# Altium PCB MAIN.PcbDoc
Units mm, origin at the board's own origin, x right, y up, seen from the top; angles counter-clockwise.
Board outline 12.7 x 40.42 mm, 2 copper layers (Top Layer, Bottom Layer); 36 components, 21 nets, 115 pads, 24 vias.
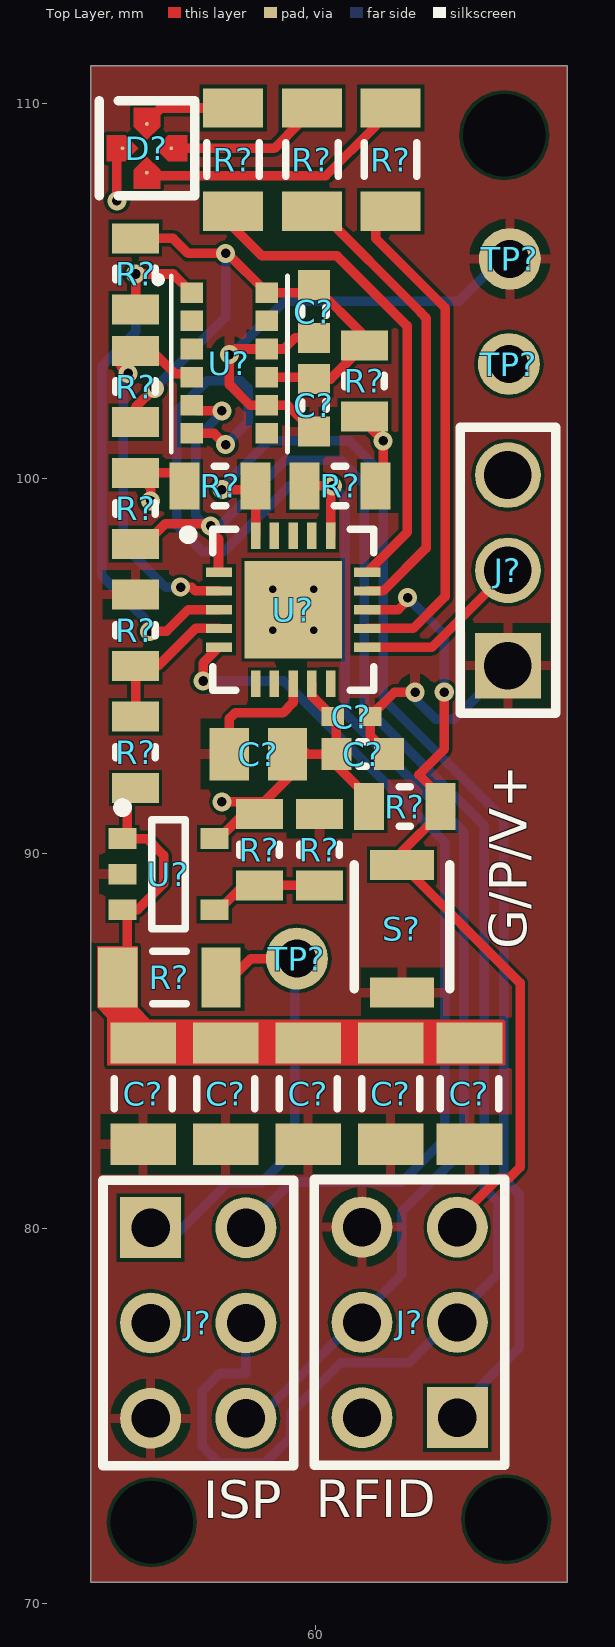
[diagram p0: Top Layer view]
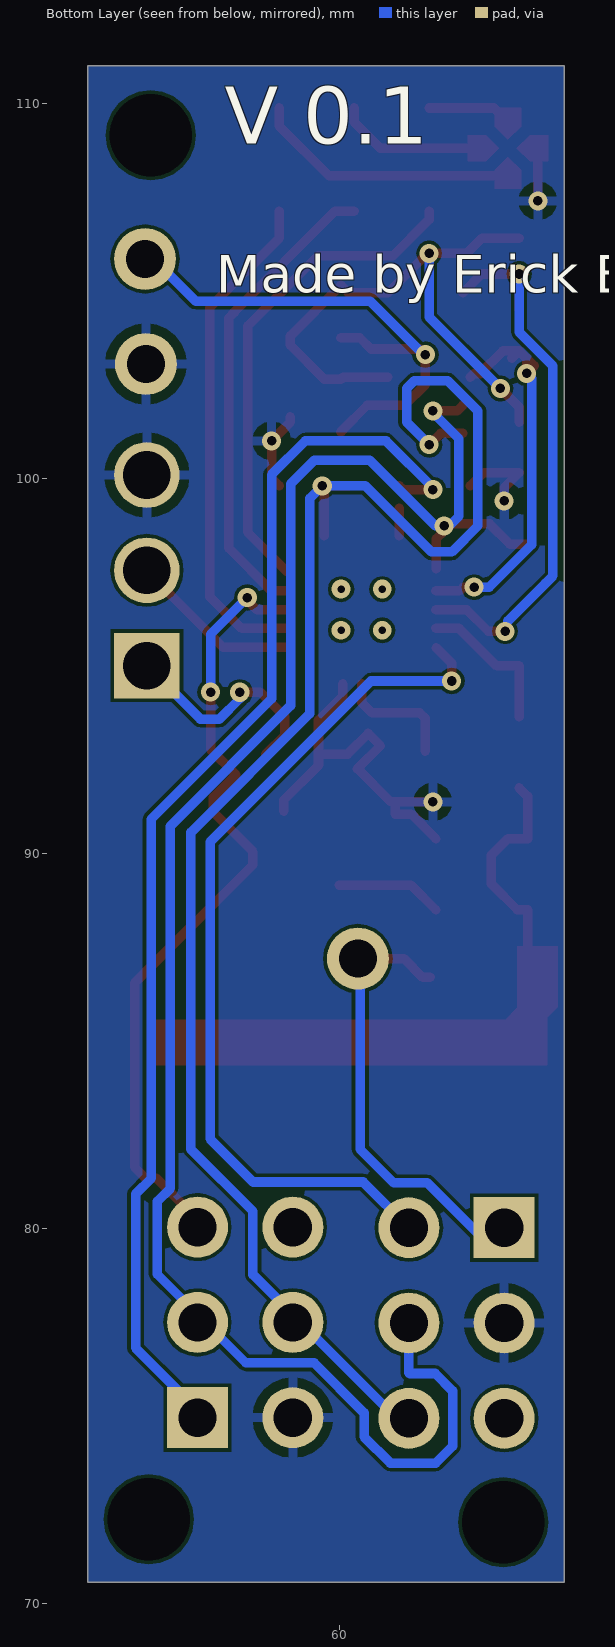
[diagram p1: Bottom Layer view, seen from below]
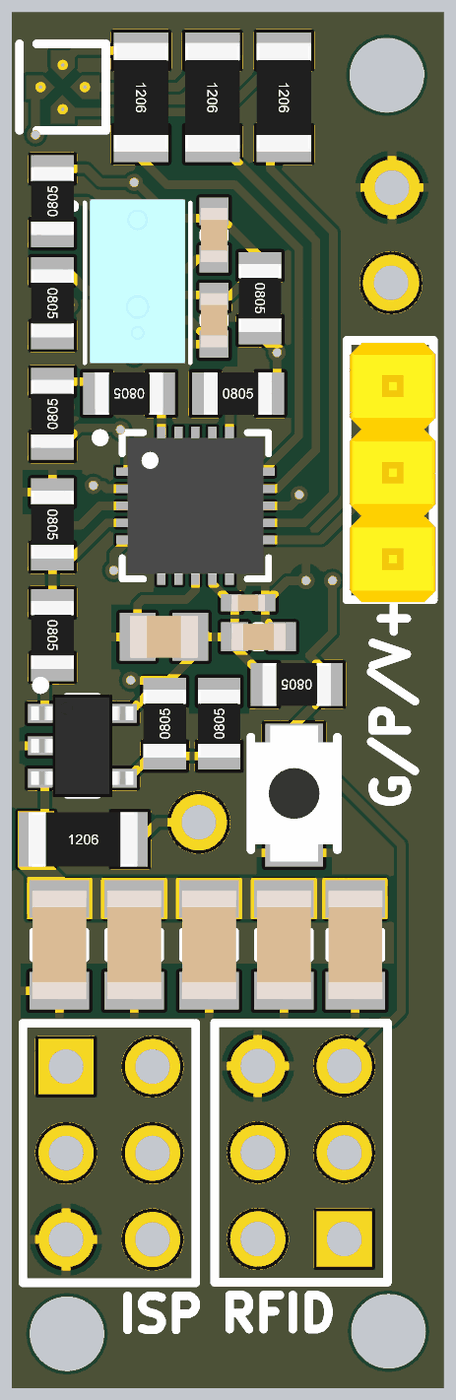
[diagram p2: 3D render of the assembled board from above, using the file's embedded part models]

## Layer stack, top to bottom
Top Solder: solder mask 0.0102, Solder Resist, Dk 3.5
Top Layer: signal copper 0.0356
Dielectric 1: dielectric 0.32, FR-4, Dk 4.8
Bottom Layer: signal copper 0.0356
Bottom Solder: solder mask 0.0102, Solder Resist, Dk 3.5

## Board outline
54,70.575 66.7,70.575 66.7,111 54,111

## Design rules (kind name [scope] priority, off if disabled: settings)
Clearance [All] p1: gap=0.09 ignorepadtopadclearanceinfootprint=FALSE
PolygonConnect [All] p1: connectstyle=Relief reliefconductorwidth=0.254 reliefentries=4 polygonreliefangle="90 Angle" airgapwidth=0.254
RoutingVias [All] p1: holewidth=0.711 width=1.27 viastyle="Through Hole" minholewidth=0.711 minwidth=1.27 maxholewidth=0.711 maxwidth=1.27
SolderMaskExpansion [All] p1: expansion=0.102
Width [All] p1: maxlimit=0.254 minlimit=0.254 preferedwidth=0.254
30 further rules are at their usual default settings.

## Classes and differential pairs
component class "Time of Flight": C? R? U?
component class "Power Supply": C? R1 R2 R? U?
component class MagController: C? D? J? R? S? TP? U?

## Components (designator, comment, footprint, x,y, rotation, side; value= is the part's Value field where it differs from the comment)
C? "CAP_100UF_1206_SMD" C1206 64.1,83.6 r270 top
C? "__template_cap" C0603 59.95,101.95 r270 top
C? "__template_cap" C0603 59.95,104.45 r270 top
C? "__template_cap" C0805 58.475,92.65 r0 top
C? "__template_cap" C0603 61.25,92.65 r180 top
C? "399-3520-1-ND" C0402 60.95,93.65 r180 top value=1e-07
C? "CAP_100UF_1206_SMD" C1206 59.8,83.6 r270 top
C? "CAP_100UF_1206_SMD" C1206 55.4,83.6 r270 top
C? "CAP_100UF_1206_SMD" C1206 62,83.6 r270 top
C? "CAP_100UF_1206_SMD" C1206 57.6,83.6 r270 top
D? "LED_CL-503T-SD-T" LED_RGB_CL-503T-SD-T 55.5,108.8 r270 top
J? "CONN_2X3" CONN_2x3_100MIL 62.505,77.5 r180 top
J? "CONN_1x3_640454-3" CONN_1x3_100MIL 65.125,95.01 r180 top
J? "CONN HEADER 6POS RA SMT" CONN_2x3_100MIL 56.87,77.485 r0 top
R? "__template_resistor" R0805 61.3,102.6 r270 top
R? "__template_resistor" R0805 58.5,90.1 r90 top
R? "__template_resistor" R0805 60.1,90.1 r90 top
R? "__template_resistor" R0805 55.2,92.7 r270 top
R? "__template_resistor" R0805 55.2,95.95 r270 top
R? "__template_resistor" R0805 55.2,99.2 r90 top
R? "__template_resistor" R0805 57.45,99.8 r180 top
R? "__template_resistor" R0805 60.65,99.8 r0 top
R? "__template_resistor" R0805 62.375,91.25 r180 top
R? "__template_resistor" R1206 62,108.5 r270 top value=200
R? "__template_resistor" R1206 57.8,108.5 r270 top value=30
R? "__template_resistor" R1206 59.9,108.5 r270 top value=30
R? "__template_resistor" R1206 56.1,86.7 r0 top value=200
R? "__template_resistor" R0805 55.2,105.45 r90 top
R? "__template_resistor" R0805 55.2,102.45 r270 top
S? "B3U-1000P" SWITCH_B3U-1000P 62.3,89.7 r270 top
TP? "TEST_POINT_BLACK_KEYSTONE_5001" TEST_POINT_KEYSTONE_5001 65.175,105.85 r0 top
TP? "TEST_POINT_RED_KEYSTONE_5000" TEST_POINT_KEYSTONE_5000 65.15,103.05 r0 top
TP? "TEST_POINT_WHITE_KEYSTONE_5002" TEST_POINT_KEYSTONE_5002 59.5,87.2 r0 top
U? "TOF_VL6180X" TOF_VL6180X 56.7,104.95 r270 top
U? "MCU_ATTINY84V" 20QFN4 59.4,96.5 r0 top
U? "LDO_MIC5225-3.5YM5 TR" 5SOT23 56.075,89.45 r0 top

## Footprints (in the part's own frame and the unit in brackets; to place one, negate y for a bottom-side part, rotate by r counter-clockwise, add the part's x,y. Pads: shape width x height; smd on the part's side, far side on the other; paste and mask are expansions set on the pad)
5SOT23 [mm] "SOT23, 5-Leads, Body 2.9x2.8mm (max), Pitch 0.95mm, IPC High Density"
  rect 0.75x0.55 smd: 1(-1.225,0.95) 2(-1.225,0) 3(-1.225,-0.95) 4(1.225,-0.95) 5(1.225,0.95)
  silkscreen extent -1.35,-1.45 0.45,1.9, body extent -1.5,-1.5 1.5,1.5, height 1.46
20QFN4 [mm] "QFN, 20-Leads, Body 4.00x4.00mm, Pitch 0.50mm, Thermal Pad 2.60x2.60mm, IPC High Density"
  rect 0.7x0.25 smd mask+0.076: 1(-1.975,1) 2(-1.975,0.5) 3(-1.975,0) 4(-1.975,-0.5) 5(-1.975,-1) 11(1.975,-1) 12(1.975,-0.5) 13(1.975,0) 14(1.975,0.5) 15(1.975,1)
  rect 0.25x0.7 smd mask+0.076: 6(-1,-1.975) 7(-0.5,-1.975) 8(0,-1.975) 9(0.5,-1.975) 10(1,-1.975) 16(1,1.975) 17(0.5,1.975) 18(0,1.975) 19(-0.5,1.975) 20(-1,1.975)
  rect 2.6x2.6 smd mask+0.076: 21(0,0)
  silkscreen extent -2.92,-2.15 2.15,2.15, body extent -2.01,-2.01 2.01,2.01, height 0.85
C0402 [mm] "Chip Capacitor, 2-Leads, Body 1.0x0.5mm, IPC High Density"
  rect 0.6x0.5 smd: 1(-0.5,0) 2(0.5,0)
  body extent -0.5,-0.25 0.5,0.25, height 0.5
C0603 [mm] "Chip Capacitor, 2-Leads, Body 1.6x0.8mm, IPC High Density"
  rect 0.8x0.85 smd: 1(-0.7,0) 2(0.7,0)
  silkscreen extent -0.1,-0.33 0.1,0.33, body extent -0.8,-0.4 0.8,0.4, height 0.8
C0805 [mm] "Chip Capacitor, 2-Leads, Body 2.0x1.3mm, IPC High Density"
  rect 1.05x1.4 smd: 1(-0.775,0) 2(0.775,0)
  body extent -1,-0.62 1,0.63, height 0.6
C1206 [mm] "Chip Capacitor, 2-Leads, Body 3.2x1.6mm, IPC High Density"
  rect 1.1x1.75 smd: 1(-1.35,0) 2(1.35,0)
  silkscreen extent -0.4,-0.77 0.4,0.77, body extent -1.6,-0.8 1.6,0.8, height 0.78
CONN_1x3_100MIL [mm] "TE 640454-3"
  rect 1.75x1.75 hole 1.27: 1(0,0)
  round 1.75 hole 1.27: 2(0,-2.54) 3(0,-5.08)
  silkscreen extent -1.27,-6.35 1.27,1.27, body extent -1.35,-6.27 1.19,1.35, height 9.5
CONN_2x3_100MIL [mil] "6 pin jtag header"
  rect 64x64 hole 40.16: 1(-50,100)
  round 64 hole 40.16: 2(50,100) 3(-50,0) 4(50,0) 5(-50,-100) 6(50,-100)
  silkscreen extent -100,-150 100,150
LED_RGB_CL-503T-SD-T [mm]
  round 0.1 smd: 1(0.651,0) 2(0,-0.651) 3(-0.651,0) 4(0,0.651)
  Top Layer region: 0.35,-1.076 0.35,-0.576 0,-0.226 -0.35,-0.576 -0.35,-1.076
  Top Layer region: -1.076,-0.35 -0.576,-0.35 -0.226,0 -0.576,0.35 -1.076,0.35
  Top Layer region: -0.35,1.076 -0.35,0.576 0,0.226 0.35,0.576 0.35,1.076
  Top Layer region: 1.076,0.35 0.576,0.35 0.226,0 0.576,-0.35 1.076,-0.35
  silkscreen extent -1.27,-1.27 1.27,1.27, body extent -0.65,-0.76 0.65,0.76, height 0.35
R0805 [mm] "Chip Resistor, 2-Leads, Body 2.0x1.3mm, IPC High Density"
  rect 0.8x1.25 smd: 1(-0.95,0) 2(0.95,0)
  silkscreen extent -0.15,-0.53 0.15,0.53, body extent -1,-0.62 1,0.63, height 0.6
R1206 [mm] "Chip Resistor, 2-Leads, Body 3.1x1.6mm, IPC High Density"
  rect 1.05x1.6 smd: 1(-1.375,0) 2(1.375,0)
  silkscreen extent -0.45,-0.7 0.45,0.7, body extent -1.6,-0.8 1.6,0.8, height 0.6
SWITCH_B3U-1000P [mm]
  rect 0.8x1.7 smd: 1(0,0) 2(3.4,0)
  silkscreen extent 0,-1.27 3.3,1.27, body extent -0.35,-1.25 3.65,1.25, height 1.6
TEST_POINT_KEYSTONE_5000 [mil] "Red T/H Test Point"
  round 65 hole 40: 1(0,0)
  body extent -50,-50 50,50, height 180
TEST_POINT_KEYSTONE_5001 [mil] "Black T/H Test Point"
  round 65 hole 40: 1(0,0)
  body extent -50,-50 50,50, height 180
TEST_POINT_KEYSTONE_5002 [mil] "White T/H Test Point"
  round 65 hole 40: 1(0,0)
  body extent -50,-50 50,50, height 180
TOF_VL6180X [mm] "Proximity and ambient light sensing (ALS) module footprint"
  rect 0.55x0.6 smd: 1(0,0) 2(0.75,0) 3(1.5,0) 4(2.25,0) 5(3,0) 6(3.75,0) 7(3.75,2) 8(3,2) 9(2.25,2) 10(1.5,2) 11(0.75,2) 12(0,2)
  silkscreen extent -0.45,-0.95 4.25,2.55, body extent -0.55,-0.4 4.25,2.4, height 1

## Part data
C? C? C? C? C?: "100UF SMD CAP CERAMIC", Capacitance=100µF, Manufacturer="Murata Electronics North America", Manufacturer Part Number=GRM31CD80J107ME39L, Operating Temperature="-55°C ~ 105°C", Package / Case="1206 (3216 Metric)", Ratings=-, Supplier Part Number 1=490-10525-1-ND, Temperature Coefficient=X6T, tolerance=±20%, Voltage - Rated=6.3V, Applications="General Purpose", Category=Capacitors, ComponentLink1Description=http://www.murata.com/~/media/webrenewal/support/library/catalog/products/capacitor/mlcc/c02e.ashx, ComponentLink1URL=http://www.murata.com/~/media/webrenewal/support/library/catalog/products/capacitor/mlcc/c02e.ashx, Features="Derating Recommended", Height - Seated (Max)=-, Lead Spacing=-, Lead Style=-, Mounting Type="Surface Mount, MLCC", Packaging="Cut Tape (CT)", Part Status=Active, Pricing 1="1=0.55, 10=0.388, 25=0.3308, 50=0.2932, 100=0.2553, 250=0.21748, 500=0.1891, 1000=0.16074 (USD)", RoHS="RoHS Compliant", Size / Dimension="0.126\" L x 0.063\" W (3.20mm x 1.60mm)", Stock 1=406964, Supplier 1=Digi-Key, Thickness (Max)="0.071\" (1.80mm)"
C? C?: library part "CAP CER 0603 0.1µF X7R 50V 10%", Capacitance (shorthand)=0.1µF, Capacitance - pF (Machine readable)=100000, Dielectric=X7R, Manufacturer="Murata Electronics North America", Rated Voltage=50V, Supplier Part Number 1=490-1519-1-ND, Supplier 1=Digikey, type=capacitor
C?: library part "CAP CER 0.1UF 50V X7R 0805", Capacitance (shorthand)=0.1µF, Capacitance - pF (Machine readable)=100000, Dielectric=X7R, Manufacturer="Murata Electronics North America", Rated Voltage=50V, Supplier Part Number 1=490-1666-1-ND, type=capacitor
C?: library part "CAP CER 2.2UF 16V X5R 0603 10%", Capacitance (shorthand)=2.2µF, Capacitance - pF (Machine readable)=2200000, Dielectric=X5R, Manufacturer="Murata Electronics North America", Rated Voltage=25V, Supplier Part Number 1=490-10731-1-ND, Supplier 1=Digikey, type=capacitor
C?: human_value=100n, package=0402, tolerance=10%, voltage=10.0, price=0.06, Supplier Part Number 1=399-3520-1-ND, type=capacitor
D?: "RGB LOW VOLTAGE RICOLOR TOP FIRING 1.5 X 1.3 X", Color="Red, Green, Blue (RGB)", Current - Test="5mA Red, 5mA Green, 5mA Blue", Lens Color=-, Manufacturer=Citizen, Manufacturer Part Number=CL-503T-SD-T, Millicandela Rating="36mcd Red, 180mcd Green, 40mcd Blue", Package / Case="4-SMD, No Lead", Supplier Part Number 1=1642-1509-2-ND, Voltage - Forward (Vf) (Typ)="1.85V Red, 2.7V Green, 2.75V Blue", Category=Optoelectronics, ComponentLink1Description=http://ce.citizen.co.jp/up_img/product/KF9Gun57LXzH/CL-503_e.pdf, ComponentLink1URL=http://ce.citizen.co.jp/up_img/product/KF9Gun57LXzH/CL-503_e.pdf, Configuration="Common Anode", Features=-, Height (Max)=0.35mm, Lens Style/Size="Rectangle with Flat Top, 1.30mm x 1.50mm", Lens Transparency=-, Mounting Type="Surface Mount", Packaging="Tape & Reel (TR)", Part Status=Active, Pricing 1="5000=0.2318, 10000=0.22836, 25000=0.22321 (USD)", RoHS="RoHS Compliant", Size / Dimension="1.50mm L x 1.30mm W", Stock 1=15000, Supplier 1=Digi-Key, Supplier Device Package=-, Viewing Angle=-, Wavelength - Dominant=-, Wavelength - Peak="618nm Red, 530nm Green, 470nm Blue"
J?: "CONN HEADER VERT 3POS .100 TIN", Color=Natural, Manufacturer="TE Connectivity", Manufacturer Part Number=640454-3, Supplier Part Number 1=A19430-ND, Category="Connectors, Interconnects", ComponentLink1Description=Datasheet, ComponentLink1URL=http://www.te.com/commerce/DocumentDelivery/DDEController?Action=srchrtrv&DocNm=640454&DocType=Customer+Drawing&DocLang=English, Connector Type="Header, Unshrouded", Contact Finish=Tin, Contact Finish Thickness=-, Contact Mating Length="0.295\" (7.49mm)", Contact Type="Male Pin", Fastening Type=-, Features="Polarizing Key", Mounting Type="Through Hole", Number of Positions=3, Number of Positions Loaded=All, Number of Rows=1, Packaging=Bulk, Pitch="0.100\" (2.54mm)", Pricing 1="1=0.17, 10=0.162, 25=0.1204, 50=0.1032, 100=0.0997, 250=0.08592, 500=0.08248, 1000=0.07218, 2500=0.0653 (USD)", RoHS="RoHS Compliant", Row Spacing=-, Stock 1=6372, Supplier 1=Digi-Key, Termination=Solder
J?: library part CONN_2X3
R?: library part "RES SMD 0 OHM JUMPER 1/8W 0805", Manufacturer=Yageo, Manufacturer Part Number=RC0805FR-070RL, Operating Temperature="-55°C ~ 155°C", Power (Watts)="0.125W, 1/8W", Resistance="0 ?", Resistance (Sortable)=0, Supplier Part Number 1=311-0.0CRCT-ND, Temperature Coefficient=-, tolerance=Jumper, Datasheets=http://www.yageo.com/documents/recent/PYu-RC_Group_51_RoHS_L_9.pdf, Image=//media.digikey.com/Renders/Yageo%20Renders/0805-(2012-Metric).jpg, Supplier 1=Digikey
R?: library part "RES SMD 124K OHM 1% 1/8W 0805", Manufacturer=Yageo, Manufacturer Part Number=RC0805FR-07124KL, Operating Temperature="-55°C ~ 155°C", Power (Watts)="0.125W, 1/8W", Resistance="124 k?", Resistance (Sortable)=124000, Supplier Part Number 1=311-124KCRCT-ND, Temperature Coefficient=±100ppm/°C, tolerance=±1%, Datasheets=http://www.yageo.com/documents/recent/PYu-RC_Group_51_RoHS_L_9.pdf, Image=//media.digikey.com/Renders/Yageo%20Renders/0805-(2012-Metric).jpg, Supplier 1=Digikey
R? R? R?: library part "RES SMD 100K OHM 1% 1/8W 0805", Manufacturer=Yageo, Manufacturer Part Number=RC0805FR-07100KL, Operating Temperature="-55°C ~ 155°C", Power (Watts)="0.125W, 1/8W", Resistance="100 k?", Resistance (Sortable)=100000, Supplier Part Number 1=311-100KCRCT-ND, Temperature Coefficient=±100ppm/°C, tolerance=±1%, Datasheets=http://www.yageo.com/documents/recent/PYu-RC_Group_51_RoHS_L_9.pdf, Image=//media.digikey.com/Renders/Yageo%20Renders/0805-(2012-Metric).jpg, Supplier 1=Digikey
R? R? R? R? R? R?: library part "RES SMD 4.7K OHM 1% 1/8W 0805", Manufacturer=Yageo, Manufacturer Part Number=RC0805FR-074K7L, Operating Temperature="-55°C ~ 155°C", Power (Watts)="0.125W, 1/8W", Resistance="4.7 k?", Resistance (Sortable)=4700, Supplier Part Number 1=311-4.70KCRCT-ND, Temperature Coefficient=±100ppm/°C, tolerance=±1%, Datasheets=http://www.yageo.com/documents/recent/PYu-RC_Group_51_RoHS_L_9.pdf, Image=//media.digikey.com/Renders/Yageo%20Renders/0805-(2012-Metric).jpg, Supplier 1=Digikey
R? R?: library part "RES SMD 200 OHM 1% 1/4W 1206", Manufacturer="Vishay Dale", Manufacturer Part Number=CRCW1206200RFKEA, package="1206 (3216 Metric)", Power (Watts)="0.25W, 1/4W", Resistance (Machine readable)=200.00, Supplier Part Number=541-200FCT-ND, tolerance=±1%, Mouser PN Opt 1=71-CRCW1206200RFKEA, Mouser PN Opt 2=71-CRCW1206-200-E3, Packaging="Cut Tape (CT)", Series=CRCW, Supplier 1=Digikey, Supplier 2=Mouser, Supplier Part Number 1=541-200FCT-ND, Supplier Part Number 2=71-CRCW1206-200-E3, type=resistor, Unit Price (USD)=0.102
R? R?: library part "RES SMD 30 OHM 1% 1/4W 1206", Manufacturer="Vishay Dale", Manufacturer Part Number=CRCW120630R0FKEA, package="1206 (3216 Metric)", Power (Watts)="0.25W, 1/4W", Resistance (Machine readable)=30.00, Supplier Part Number=541-30.0FCT-ND, tolerance=±1%, Mouser PN Opt 1=71-CRCW120630R0FKEA, Mouser PN Opt 2=71-CRCW1206-30-E3, Packaging="Cut Tape (CT)", Series=CRCW, Supplier 1=Digikey, Supplier 2=Mouser, Supplier Part Number 1=541-30.0FCT-ND, Supplier Part Number 2=71-CRCW1206-30-E3, type=resistor, Unit Price (USD)=0.102
S?: library part SWITCH_SPST-NO, "SWITCH TACTILE SPST-NO 0.05A 12V", Contact Rating @ Voltage="0.05A @ 12VDC", Illumination Type, Color=-, Manufacturer="Omron Electronics Inc-EMC Div", Operating Force=153gf, Operating Temperature="-25°C ~ 70°C", Supplier Part Number 1=SW1020CT-ND, Actuator Height off PCB, from Pins=1.60mm, Actuator Material=-, Actuator Orientation="Top Actuated", Actuator Type=Standard, Category=Switches, Circuit=SPST-NO, ComponentLink1Description=http://components.omron.com/components/web/pdflib.nsf/0/2DD3893C7DD33E9E862572900079E9D6/$file/B3U_1110.pdf, ComponentLink1URL=http://components.omron.com/components/web/pdflib.nsf/0/2DD3893C7DD33E9E862572900079E9D6/$file/B3U_1110.pdf, Features=-, Illumination=Non-Illuminated, Illumination Voltage (Nominal)=-, Ingress Protection="Dust Proof", Manufacturer Part Number=B3U-1000P, Mechanical Life="200,000 Cycles", Mounting Type="Surface Mount", Outline="3.00mm x 2.50mm", Packaging="Cut Tape (CT)", Pricing 1="1=1.25, 10=1.201, 25=1.1332, 50=0.997, 100=0.9064, 250=0.86108, 500=0.83842, 1000=0.65714 (USD)", RoHS="RoHS Compliant", Stock 1=16437, Supplier 1=Digi-Key, Switch Function=Off-Mom, Switch Travel=0.15mm, Termination Style="SMD (SMT) Tab"
TP?: "BLACK T/H TEST POINT", Color=Black, Manufacturer="Keystone Electronics", Manufacturer Part Number=5001, Supplier Part Number 1=36-5001-ND, Category="Test and Measurement", ComponentLink1Description=http://www.keyelco.com/product-pdf.cfm?p=1310, ComponentLink1URL=http://www.keyelco.com/product-pdf.cfm?p=1310, Material - Body="Phosphor Bronze", Material - Insulation="Nylon 46, UL 94V-0", Mounting Type="0.040\" (1.02mm) Hole Diameter", Packaging=Bulk, Part Status=Active, Plating=Silver, Pricing 1="1=0.37, 10=0.316, 50=0.2298, 100=0.2209, 250=0.19832, 500=0.18932, 1000=0.1616, 2500=0.14424, 5000=0.13523 (USD)", RoHS="RoHS Compliant", Size / Dimension="0.100\" Dia x 0.180\" L (2.54mm x 4.57mm)", Stock 1=718799, Supplier 1=Digi-Key, type="PC Test Point, Miniature"
TP?: "RED T/H TEST POINT", Color=Red, Manufacturer="Keystone Electronics", Manufacturer Part Number=5000, Supplier Part Number 1=36-5000-ND, Category="Test and Measurement", ComponentLink1Description=http://www.keyelco.com/product-pdf.cfm?p=1309, ComponentLink1URL=http://www.keyelco.com/product-pdf.cfm?p=1309, Material - Body="Phosphor Bronze", Material - Insulation="Nylon 46, UL 94V-0", Mounting Type="0.040\" (1.02mm) Hole Diameter", Packaging=Bulk, Part Status=Active, Plating=Silver, Pricing 1="1=0.37, 10=0.316, 50=0.2298, 100=0.2209, 250=0.19832, 500=0.18932, 1000=0.1616, 2500=0.14424, 5000=0.13523 (USD)", RoHS="RoHS Compliant", Size / Dimension="0.100\" Dia x 0.180\" L (2.54mm x 4.57mm)", Stock 1=399527, Supplier 1=Digi-Key, type="PC Test Point, Miniature"
TP?: "WHITE T/H TEST POINT", Color=White, Manufacturer="Keystone Electronics", Manufacturer Part Number=5002, Supplier Part Number 1=36-5002-ND, Category="Test and Measurement", ComponentLink1Description=http://www.keyelco.com/product-pdf.cfm?p=1311, ComponentLink1URL=http://www.keyelco.com/product-pdf.cfm?p=1311, Material - Body="Phosphor Bronze", Material - Insulation="Nylon 46, UL 94V-0", Mounting Type="0.040\" (1.02mm) Hole Diameter", Packaging=Bulk, Part Status=Active, Plating=Silver, Pricing 1="1=0.37, 10=0.316, 50=0.2298, 100=0.2209, 250=0.19832, 500=0.18932, 1000=0.1616, 2500=0.14424, 5000=0.13523 (USD)", RoHS="RoHS Compliant", Size / Dimension="0.100\" Dia x 0.180\" L (2.54mm x 4.57mm)", Stock 1=460002, Supplier 1=Digi-Key, type="PC Test Point, Miniature"
U?: "Proximity and ambient light sensing (ALS) module", Manufacturer=STMicroelectronics, Manufacturer Part Number=VL6180XV0NR/1, Operating Temperature="-10°C ~ 60°C", Package / Case="12-SMD Module", Supplier Device Package=12-SMD, Supplier Part Number 1=497-14702-1-ND, Voltage - Supply="2.6 V ~ 3 V", Category="Sensors, Transducers", ComponentLink1Description=http://www.st.com/content/ccc/resource/technical/document/datasheet/c4/11/28/86/e6/26/44/b3/DM00112632.pdf/files/DM00112632.pdf/jcr:content/translations/en.DM00112632.pdf, ComponentLink1URL=http://www.st.com/content/ccc/resource/technical/document/datasheet/c4/11/28/86/e6/26/44/b3/DM00112632.pdf/files/DM00112632.pdf/jcr:content/translations/en.DM00112632.pdf, Mounting Type="Surface Mount", Output Type=I²C, Packaging="Cut Tape (CT)", Part Status=Active, Pricing 1="1=4.91, 10=4.413, 100=3.6153 (USD)", Proximity Detection=Yes, RoHS="RoHS Compliant", Stock 1=2774, Supplier 1=Digi-Key, type=Ambient, Wavelength=-
U?: "Attiny84 Surface Mount Extended Voltage Range", Manufacturer="Microchip Technology", Manufacturer Part Number=ATTINY84V-10MUR, Operating Temperature="-40°C ~ 85°C (TA)", Package / Case="20-WFQFN Exposed Pad", Supplier Device Package="20-QFN-EP (4x4)", Supplier Part Number 1=1611-ATTINY84V-10MURCT-ND, Voltage - Supply (Vcc/Vdd)="1.8 V ~ 5.5 V", Category="Integrated Circuits (ICs)", Connectivity=USI, Core Processor=AVR, Core Size=8-Bit, Data Converters="A/D 8x10b", EEPROM Size="512 x 8", Oscillator Type=Internal, Packaging="Cut Tape (CT)", Part Status=Active, Peripherals="Brown-out Detect/Reset, POR, PWM, Temp Sensor, WDT", Pricing 1="1=1.01, 25=0.92, 100=0.835 (USD)", Program Memory Size="8KB (4K x 16)", Program Memory Type=FLASH, RAM Size="512 x 8", RoHS="RoHS Compliant", Speed=10MHz, Stock 1=9687, Supplier 1=Digi-Key
U?: "IC REG LINEAR 3.3V 150MA SOT23-5", Base Part Number=MIC5225, Current - Output=150mA, Manufacturer="Microchip Technology", Manufacturer Part Number=MIC5225-3.3YM5-TR, Operating Temperature="-40°C ~ 125°C", Package / Case="SC-74A, SOT-753", Supplier Device Package=SOT-23-5, Supplier Part Number 1=576-2980-1-ND, Voltage - Input (Max)=16V, Voltage - Output (Max)=-, Voltage - Output (Min/Fixed)=3.3V, Voltage Dropout (Max)="0.45V @ 150mA", Category="Integrated Circuits (ICs)", ComponentLink1Description=http://www.microchip.com/mymicrochip/filehandler.aspx?ddocname=en579718, ComponentLink1URL=http://www.microchip.com/mymicrochip/filehandler.aspx?ddocname=en579718, Control Features=Enable, Mounting Type="Surface Mount", Output Configuration=Positive, Output Type=Fixed, Packaging="Cut Tape (CT)", Part Status=Active, Pricing 1="1=0.41, 25=0.3392, 100=0.3074 (USD)", Protection Features="Over Current, Over Temperature, Reverse Polarity", PSRR=-, RoHS="RoHS Compliant", Stock 1=14087, Supplier 1=Digi-Key

## Free pads (board coordinates)
  round 1.524 hole 2.2 unplated: 2(55.625,72.175) 2(65.025,109.15) 2(65.075,72.25)

## Via types
v1: diameter 0.508, hole 0.254, Top Layer to Bottom Layer, tented both sides, 20 vias
v2: diameter 0.5, hole 0.2, Top Layer to Bottom Layer, 4 vias

## Nets (pads, with @x,y where several pads share a name; then routed paths per layer and width w, separated by ;. In a path a pad name is that pad's centre, name@x,y a point inside that pad or via, vN(x,y) a via of type N, cw(c..) or ccw(c..) an arc to the next point about the centre after c; other vN are vias at no path point)
+2.8V: C?.2@59.25,92.65 C?.2@60.45,93.65 C?.2@60.55,92.65 D?.2 J?.2@61.235,74.96 J?.3@55.6,77.485 J?.3@65.125,100.09 R?.2@55.2,100.15 R?.2@56.5,99.8 R?.2@58.5,91.05 R?.2@61.3,101.65 R?.2@61.6,99.8 R?.2@61.425,91.25 TP?.1@65.15,103.05 U?.5@57.3,90.4 U?.9@59.9,94.525 | length 16.9
  Top Layer w0.254: v1(54.7,107.4) 54.7,108.651 D?.2 ; v1(55.6,99.4) 55.6,99.75 55.2,100.15 56.15,100.15 R?.2@56.5,99.8 ; U?.5@57.425,90.4 58.075,91.05 58.5,91.05 R?.2@58.5,91.375 ; v1(57.5,91.375) 58.475,91.375 R?.2@58.5,91.375 ; U?.9@59.9,94.525 59.9,94.2 60.55,93.55 C?.2@60.55,92.65 ; R?.2@61.3,101.65 61.3,101.5 v1(61.8,101) 61.8,100 R?.2@61.6,99.8 ; R?.2@61.475,91.125 61.475,91.425 60.55,92.35 C?.2@60.55,92.65 ; R?.2@58.5,91.375 58.625,91.375 59.512,92.262 58.9,92.875 59.225,93.2 59.775,92.65 C?.2@60.55,92.65
"+2.8V TOF": C?.1@59.95,102.65 C?.1@59.95,105.15 R?.1@61.3,103.55 R?.2@55.2,101.5 R?.2@55.2,106.4 U?.9@58.7,102.7 U?.12@58.7,104.95 | length 16.1
  Top Layer w0.254: R?.2@55.2,101.5 55.2,101.9 v1(55.7,102.4) ; R?.2@55.2,106.4 56.2,106.4 56.6,106 v1(57.6,106) 57.65,106 58.7,104.95 59.75,104.95 59.95,105.15 61.3,103.8 61.3,103.55 60.4,102.65 59.95,102.65 59.9,102.7 U?.9@58.7,102.7
  Bottom Layer w0.254: v1(55.7,102.4) 57.6,104.3 v1(57.6,106)
+CAP_IN: C?.1@55.4,84.95 C?.1@57.6,84.95 C?.1@59.8,84.95 C?.1@62,84.95 C?.1@64.1,84.95 R?.1@54.725,86.7 R?.2@55.2,91.75 U?.1@54.85,90.4 U?.3@54.85,88.5 | length 6.7
  Top Layer w0.254: R?.1@54.975,86.85 54.975,88.5 55.25,88.5 55.95,89.2 55.95,89.95 55.5,90.4 54.975,90.4 54.975,91.525 R?.2@55.2,91.75 ; C?.1@55.075,84.775 C?.1@55.3,85 ; C?.1@62,84.95 C?.1@62.1,84.95
+H_IN: J?.1@55.6,80.025 R?.2@57.475,86.7 TP?.1@59.5,87.2 | length 13
  Top Layer w0.254: R?.2@57.575,86.7 57.775,86.7 58.275,87.2 58.95,87.2 59.5,86.65 TP?.1@59.5,87.2
  Bottom Layer w0.254: J?.1@55.6,80.025 56.075,80.025 56.075,79.648 57.646,81.219 58.544,81.219 59.438,82.113 TP?.1@59.437,86.963
B_CAT: R?.2@59.9,107.125 U?.14 | length 12.7
  Top Layer w0.254: R?.2@59.6,107.125 59.9,107.125 60.106,107.125 62.8,104.431 62.8,104.418 62.943,104.275 62.943,98.143 61.8,97 U?.14
G_CAT: R?.2@57.8,107.125 U?.15 | length 13.2
  Top Layer w0.254: R?.2@57.6,107.125 57.6,106.9 58.569,105.931 60.569,105.931 62.435,104.065 62.435,98.56 U?.15@61.383,97.508
GND: C?.1@57.7,92.65 C?.1@61.45,93.65 C?.1@61.95,92.65 C?.2@55.4,82.25 C?.2@57.6,82.25 C?.2@59.8,82.25 C?.2@59.95,101.25 C?.2@59.95,103.75 C?.2@62,82.25 C?.2@64.1,82.25 J?.1@65.125,95.01 J?.5@55.6,74.945 J?.6@61.235,80.04 R?.1@55.2,96.9 R?.2@60.1,91.05 S?.2 TP?.1@65.175,105.85 U?.2@54.85,89.45 U?.8 U?.10@58.7,103.45 | length 23.8
  Top Layer w0.254: C?.1@57.7,92.725 57.7,93.6 57.85,93.75 59.125,93.75 59.4,94.025 U?.8@59.4,94.525 ; C?.2@59.95,101.25 59.25,101.95 58.7,101.95 58.25,101.95 57.7,102.5 v1(57.7,103.3) 57.85,103.45 58.7,103.45 59.15,103.45 59.45,103.75 C?.2@59.95,103.75 ; C?.1@61.95,92.65 61.45,93.15 61.45,93.65 62.1,94.3 v1(62.65,94.3)
  Bottom Layer w0.254: v1(57.7,103.3) 57.725,103.275 59.175,104.725 63.825,104.725 TP?.1@64.975,105.875 ; v1(62.65,94.3) 62.65,94.125 63.192,93.583 63.698,93.583 J?.1@65.125,95.01
GPIO0: R?.1@55.2,103.4 U?.2@57.425,97 U?.4@56.7,102.7 | length 10.8
  Top Layer w0.254: R?.1@55.4,103.2 R?.1@55.2,103.4 ; v1(56.4,97.1) 56.691,97.1 56.791,97 U?.2@57.425,97 ; U?.4@56.5,102.7 56.406,102.794 56.242,102.794 55.636,103.4 R?.1@55.2,103.4 ; R?.1@55,103.2 54.8,103 v1(55,102.8) R?.1@55,103.2 ; R?.1@55,103.2 R?.1@55.2,103.4
  Bottom Layer w0.254: v1(55,102.8) 54.865,102.665 54.865,98.235 56,97.1 v1(56.4,97.1)
GPIO1: R?.1@55.2,104.5 U?.1@56.7,104.95 U?.3@57.425,96.5 | length 14.9
  Top Layer w0.254: R?.1@55.2,104.5 v1(55.2,105.45) 56.2,105.45 U?.1@56.7,104.95 ; v1(55.575,95.925) 56.025,95.925 56.6,96.5 U?.3@57.425,96.5
  Bottom Layer w0.254: v1(55.2,105.45) 55.2,103.9 54.3,103 54.3,97.4 54.5,97.2 55.15,96.55 55.5,96.2
MISO: J?.1@63.775,74.96 R?.1@58.4,99.8 U?.20 | length 34.3
  Top Layer w0.254: v1(57.5,99.7) 58.3,99.7 R?.1@58.4,99.8 ; U?.20 R?.1@58.4,99.206
  Bottom Layer w0.254: v1(57.5,99.7) 57.5,99.75 58.75,101 60.902,101 61.8,100.102 61.8,94.125 65.008,90.917 65.008,81.342 65.425,80.925 65.425,76.82 J?.1@63.575,74.97
NetD?_1: D?.1 R?.1@62,109.875 | length 7.1
  Top Layer w0.254: 55.7,108 55.631,108.069 60.269,108.069 61.6,109.4 R?.1@61.6,109.875
NetD?_3: D?.3 R?.1@57.8,109.875 | length 2.3
  Top Layer w0.254: 55.5,109.502 55.873,109.875 R?.1@57.6,109.875
NetD?_4: D?.4 R?.1@59.9,109.875 | length 4.2
  Top Layer w0.254: 56.151,108.969 56.32,108.8 58.9,108.8 59.6,109.5 R?.1@59.6,109.875
NetR?_1: R?.1@58.5,89.15 R?.1@60.1,89.15 U?.4@57.3,88.5 | length 2.8
  Top Layer w0.254: U?.4@57.425,88.5 58.075,89.15 58.5,89.15 R?.1@60,89.15
POT_SENSE: J?.2@65.125,97.55 U?.11@61.375,95.5 | length 4.6
  Top Layer w0.254: U?.11@61.375,95.5 63.1,95.5 J?.2@65.1,97.5
PWR_SENSE: R?.1@55.2,93.65 R?.2@55.2,95 U?.4@57.425,96 | length 4
  Top Layer w0.254: R?.1@55.2,93.65 55.2,95 55.8,95 56.8,96 U?.4@57.425,96
R_CAT: R?.2@62,107.125 U?.12@61.375,96 | length 13.5
  Top Layer w0.254: U?.12@61.375,96 62.6,96 63.451,96.851 63.451,104.549 61.6,106.4 R?.2@61.6,107.125
RESET: J?.5@63.775,80.04 R?.1@63.325,91.25 S?.1 U?.13 | length 21.7
  Top Layer w0.254: U?.13 62.2,96.5 v1@62.45,96.75 ; v1@62.45,96.718 v1@62.45,96.75 ; v1(62.45,96.825) v1@62.45,96.75 ; v1(63.428,94.305) 63.428,92.778 62.75,92.1 63.35,91.5 63.35,91.1 62.3,90.05 S?.1 65.45,86.55 65.45,81.636 65.158,81.344 64.869,81.344 J?.5@63.575,80.05
  Bottom Layer w0.254: v1(62.45,96.825) 63.428,95.847 v1(63.428,94.305)
RF_BUSY: J?.2@58.14,80.025 U?.5@57.425,95.5 | length 23.5
  Top Layer w0.254: v1(57,94.6) 57,95.075 U?.5@57.417,95.492
  Bottom Layer w0.254: v1(57,94.6) 59.15,94.6 63.442,90.308 63.442,82.392 62.294,81.244 59.359,81.244 J?.2@58.14,80.025
SCL: J?.3@63.775,77.5 J?.4@58.14,77.485 R?.1@55.2,98.25 U?.1@57.425,97.5 U?.5@56.7,101.95 | length 50.6
  Top Layer w0.254: R?.1@54.95,98.25 55.2,98.25 55.45,98.25 55.988,98.788 57,98.788 57.188,98.6 v1@57.2,98.612 ; U?.5@56.7,101.95 56.85,101.8 v1(57.5,101.8) ; v1(57.2,98.735) v1@57.2,98.612 ; U?.1@57.409,97.587 57.409,98.391 57.2,98.6 v1@57.2,98.612
  Bottom Layer w0.254: v1(57.5,101.8) 57.45,101.8 57.5,101.75 56.808,101.058 56.808,98.992 57.065,98.735 v1(57.2,98.735) 57.435,98.735 59.191,100.491 60.657,100.491 61.292,99.856 61.292,93.942 64.5,90.734 64.5,81.075 64.85,80.725 64.85,78.785 62.49,76.425 60.668,76.425 59.334,75.09 59.334,74.451 58.634,73.751 57.424,73.751 56.975,74.2 56.975,75.675 57.439,76.139 58.123,76.139 58.14,76.156 J?.4@58.14,77.485
SDA: J?.4@61.235,77.5 J?.6@58.14,74.945 R?.1@59.7,99.8 U?.6@56.7,101.2 U?.16 | length 44.3
  Top Layer w0.254: U?.6@56.7,101.2 57.292,101.2 57.592,100.9 v1(57.6,100.9) ; R?.1@59.75,99.8 v1(60.45,99.8) 60.4,99.75 U?.16
  Bottom Layer w0.254: v1(57.6,100.9) 58.2,101.5 58.2,102.4 58,102.6 57.1,102.6 56.3,101.8 56.3,98.737 56.995,98.042 57.542,98.042 59.3,99.8 v1(60.45,99.8) 60.784,99.466 60.784,93.731 63.95,90.565 63.95,82.113 62.3,80.463 62.3,78.775 61.035,77.51 58.47,74.945 J?.6@58.14,74.945
pads on no net: U?.2@56.7,104.2 U?.3@56.7,103.45 U?.6@58.4,94.525 U?.7 U?.10@60.4,94.525 U?.11@58.7,104.2 U?.17 U?.18 U?.19 U?.21
copper on no net:
  other v2: 58.85,95.95 59.95,95.95 58.85,97.05 59.95,97.05

## Polygon pours and split planes (outlines as drawn)
+2.8V on Bottom Layer "+2.8V Pour" (solid, pour order 2): 54,111 66.7,111 66.7,70.575 54,70.575
GND on Top Layer "GND Pour" (solid, pour order 0): 54,111 66.7,111 66.7,70.575 54,70.575

## Other copper
Top Layer:
  region net +CAP_IN: 55.25,85.9 55.575,85.575 65,85.575 65.05,85.525 65.05,84.375 65.025,84.35 54.45,84.35 54.45,85.625 54.175,85.9 54.175,87.525 55.25,87.525

## Silkscreen, mask and mechanical layers (free items; w line width, h text height)
Top Overlay:
  text "G/P/V+" at 65.625,87.45 h1 r90
  text "RFID" at 60,72.3 h1
  text "ISP" at 57,72.275 h1
Bottom Overlay:
  text "V 0.1" at 63.05,108.925 h1.52
  text "Made by Erick B." at 63.275,104.95 h1
Mechanical 1:
  the board outline again, w0.254